# EAGLE board PCB (EAGLE 9.7.0)
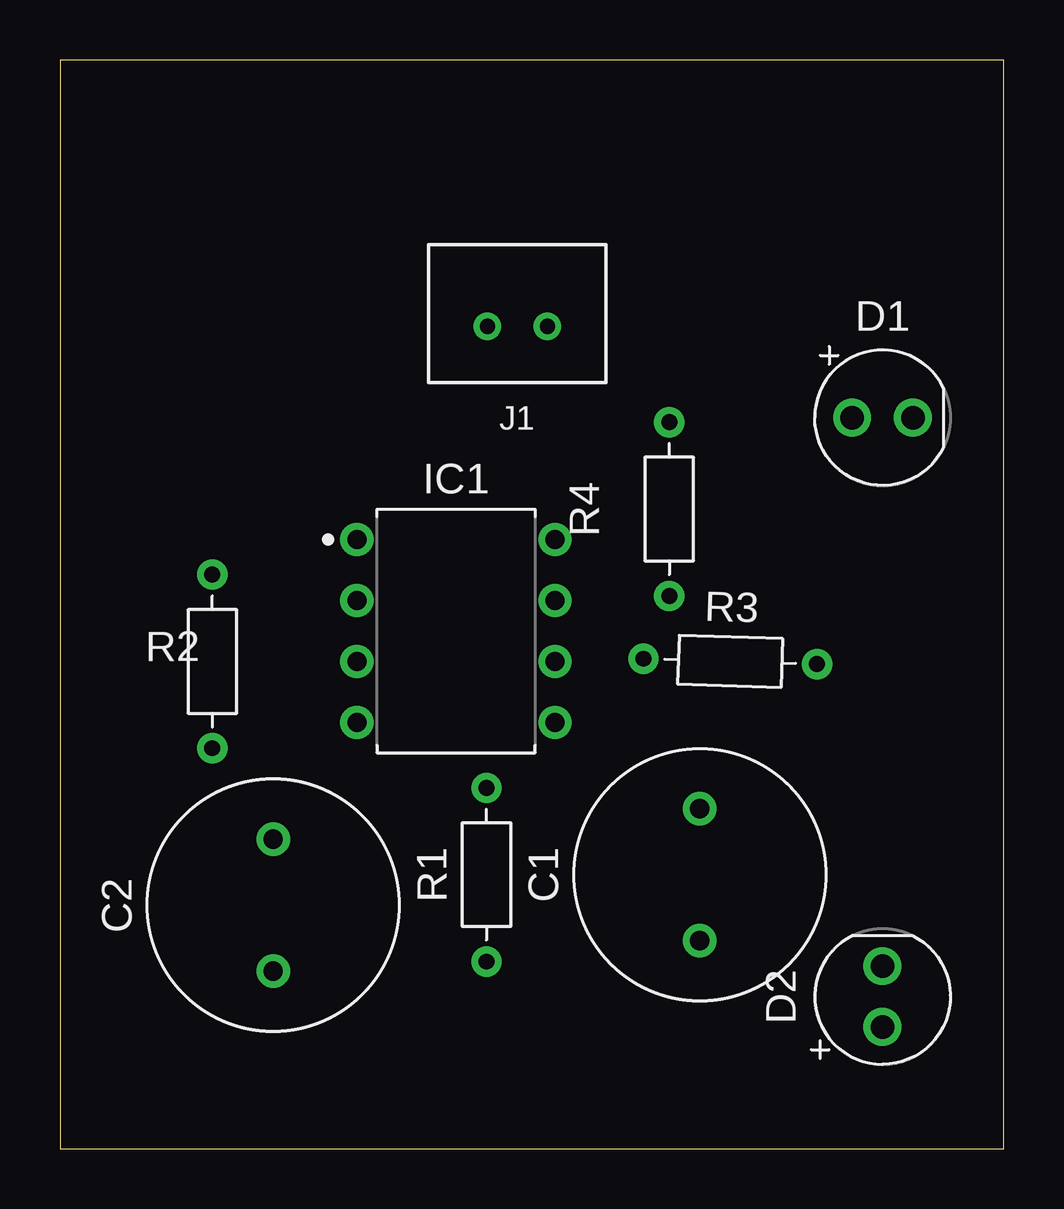
[diagram p0: board, top side]
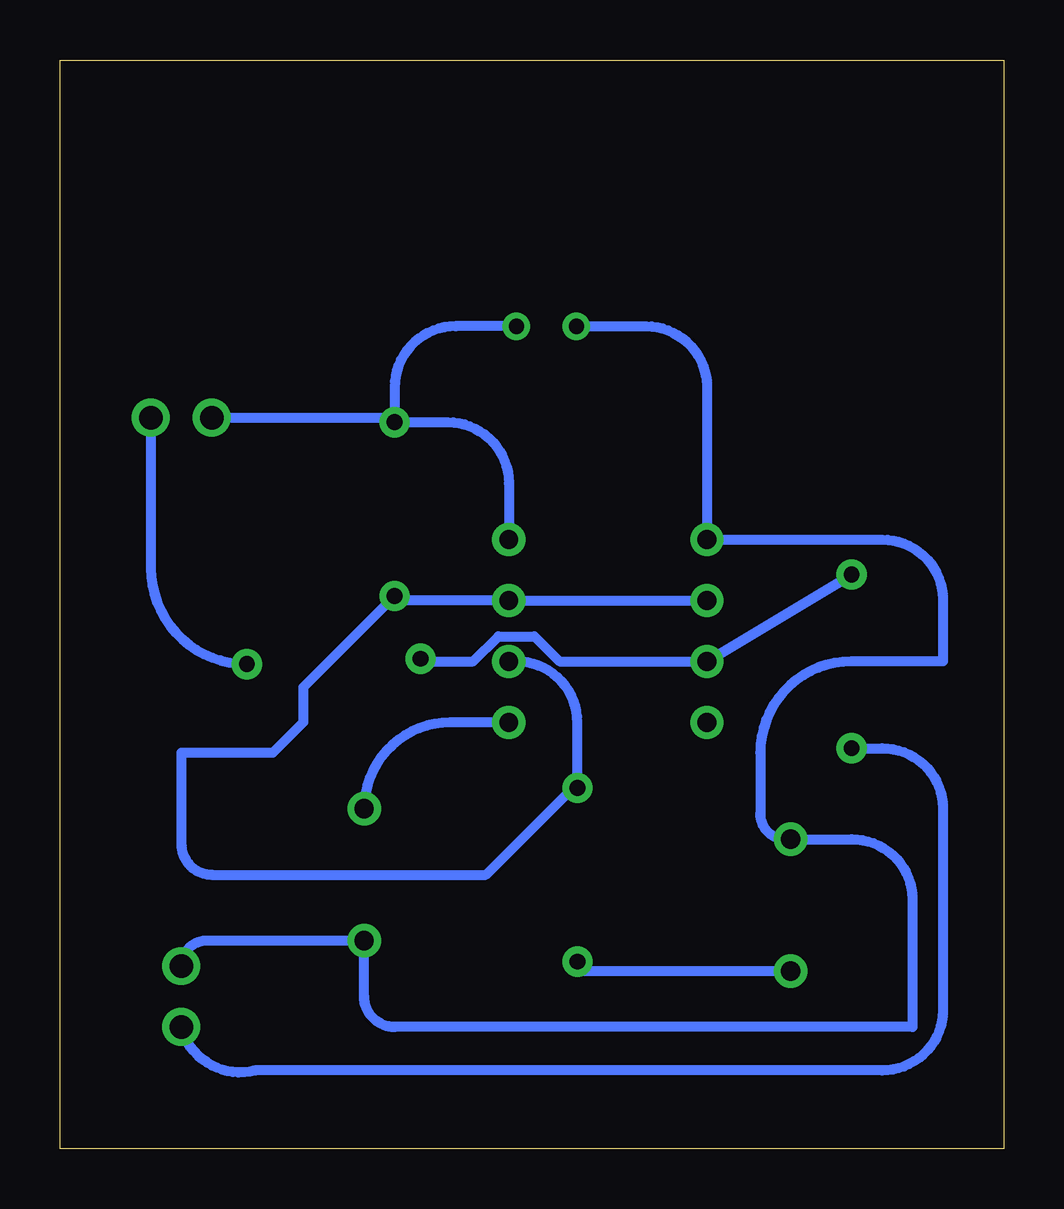
[diagram p1: board, bottom side, seen from below]

Size 39.35 x 45.39 mm. Coordinates in mm from the lower left corner, seen from the top.
Outline: 0,0 39.35,0 39.35,45.39 0,45.39 0,0
Copper layers (1*16): Top / Bottom
Stack-up Default Layer Stack: Top User Defined 0.035mm / Dielectric-1 User Defined 1.5mm / Bottom User Defined 0.035mm
Design rules "default": minimum track width 6mil, minimum drill 0.35mm, track to track 6mil, track to pad 6mil, pad to pad 6mil, via to via 6mil, smd to smd 6mil, copper to edge 40mil, drill to drill 6mil, minimum pad ring 10mil, minimum via ring 8mil, stop-mask expansion 4mil, vias tented up to drill 0mil, thermal gap 10mil

## Footprints (pad centres in the part's own frame; a part is rotated, then mirrored left to right if it is on the bottom)
CAPRD550W60D1025H1250B = drill 0.8 pad 1.4: 1 -2.75,0; 2 2.75,0
LEDRD254W60D565H860B = drill 0.981 pad 1.581: 1 -1.27,0; 2 1.27,0
LEDRD254W60D565H860B_B = drill 0.981 pad 1.581: 1 -1.27,0; 2 1.27,0
P(R-PDIP-T8) = drill 0.786 pad 1.386: 1 -4.13,3.81; 2 -4.13,1.27; 3 -4.13,-1.27; 4 -4.13,-3.81; 5 4.13,-3.81; 6 4.13,-1.27; 7 4.13,1.27; 8 4.13,3.81
B2B-XH-A = drill 0.64: 1 0,0; 2 2.5,0
RESAD724W46L381D178B = drill 0.66 pad 1.26: 1 -3.62,0; 2 3.62,0

## Placement (x,y rotation side)
C1  [CAPRD550W60D1025H1250B]  26.67,11.43 90 top
C2  [CAPRD550W60D1025H1250B]  8.89,10.16 90 top
D1  LED_RED  [LEDRD254W60D565H860B]  34.29,30.48 0 top
D2  LED_BLUE  [LEDRD254W60D565H860B_B]  34.29,6.35 90 top
IC1  LM555NR-PDIP-T8  [P(R-PDIP-T8)]  16.51,21.59 0 top
J1  3A/250V  [B2B-XH-A]  20.32,34.29 180 top
R1  [RESAD724W46L381D178B]  17.78,11.43 90 top
R2  [RESAD724W46L381D178B]  6.35,20.32 90 top
R3  [RESAD724W46L381D178B]  27.94,20.32 358.2 top
R4  [RESAD724W46L381D178B]  25.4,26.67 90 top

## Library data of the parts
C1 C2 = Tutorial - Fusion 360; CATEGORY: Capacitor
D1 D2 = Opto-Electronic; CATEGORY: Opto-Electronic; SUB-CATEGORY: LED
IC1 = Tutorial - Fusion 360
J1 = Connector; CATEGORY: CONNECTOR; DESCRIPTION: 2.5mm pitch/disconnectable crimp style connector; MANUFACTURER: JST (XH CONNECTOR); MPN: B2B-XH-A; OPERATING_TEMPERATURE: -25°C ~ 85°C; PART_STATUS: ACTIVE; ROHS_COMPLIANT: COMPLIANT; SERIES: B_B-XH-A; SUB_CATEGORY: Through hole connector; TYPE: top entry
R1-R4 = Tutorial - Fusion 360; CATEGORY: Resistor; SUB-CATEGORY: Fixed

## Nets
+V: D1.1 IC1.8 J1.1 R4.2
GND: C1.1 C2.2 D2.2 IC1.1 J1.2
N$1: C1.2 IC1.5
N$2: IC1.2 IC1.6 IC1.7 R1.2 R4.1
N$4: IC1.3 R2.2 R3.1
N$5: D1.2 R3.2
N$6: D2.1 R2.1
N$7: C2.1 R1.1

## Tracks (layer width: path | path; a pad name or v marks a point on that pad's centre or on a via)
+V
  Bottom 0.406: D1.1 25.59,30.48 R4.2 | J1.1 22.86,34.29 arc-90 25.4,31.75 R4.2 | R4.2 23.18,30.29 arc90 20.64,27.75 IC1.8
GND
  Bottom 0.406: J1.2 14.92,34.29 arc90 12.38,31.75 IC1.1 5.08,25.4 arc90 2.54,22.86 2.54,20.32 6.35,20.32 arc-90 10.16,16.51 10.16,13.97 arc-90 9.1,12.91 C2.2 6.35,12.91 arc90 3.81,10.37 3.81,5.08 25.4,5.08 arc90 26.67,6.35 C1.1 33.23,8.68 arc-90 D2.2
N$1
  Bottom 0.406: IC1.5 23.07,17.78 arc-90 C1.2
N$2
  Bottom 0.406: R1.2 17.78,15.24 | 17.78,15.24 17.78,17.78 arc-90 20.32,20.32 IC1.6 | IC1.7 25.21,22.86 arc90 R4.1 29.21,19.24 29.21,17.78 30.48,16.51 34.29,16.51 34.29,12.7 arc-90 33.02,11.43 21.59,11.43 17.78,15.24 | IC1.7 IC1.2 | IC1.7 25.4,22.86
N$4
  Bottom 0.406: R2.2 IC1.3 18.53,20.32 19.57,21.37 21.07,21.37 22.12,20.32 24.21,20.32 arc90 R3.1
N$5
  Bottom 0.406: D1.2 35.56,24.21 arc-90 R3.2
N$6
  Bottom 0.406: R2.1 5.08,16.7 arc90 2.54,14.16 2.54,5.81 arc90 5.08,3.27 31.21,3.27 arc90 D2.1
N$7
  Bottom 0.406: C2.1 17.38,7.41 arc90 R1.1